# EAGLE board MagRes Sensor (EAGLE 7.5.0)
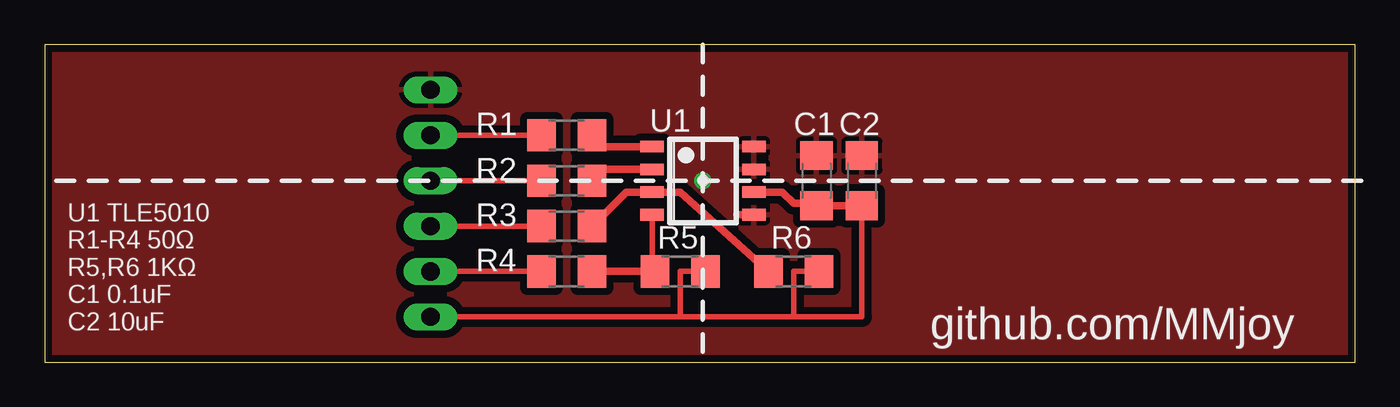
[diagram p0: board, top side]
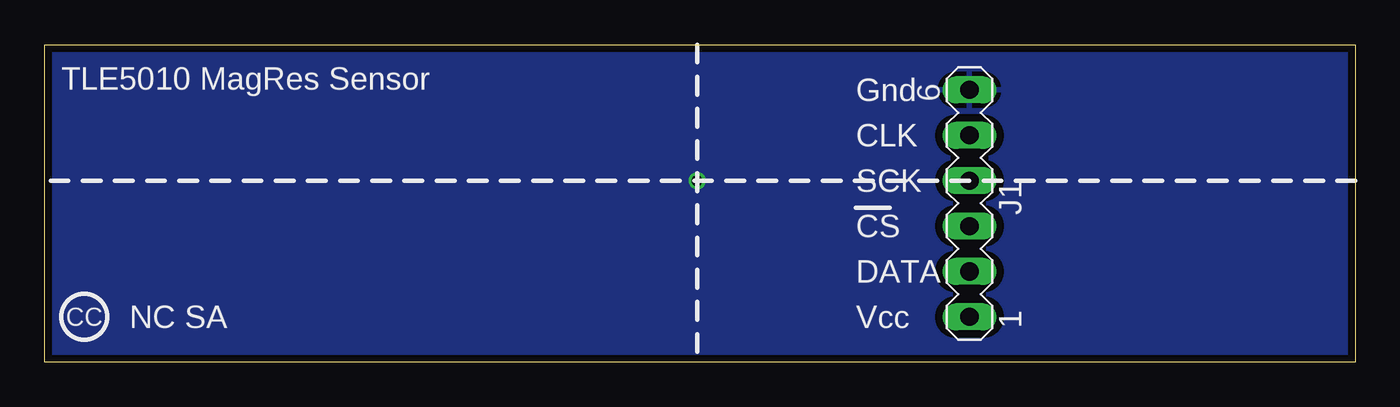
[diagram p1: board, bottom side, seen from below]

Size 73.33 x 17.77 mm. Coordinates in mm from the lower left corner, seen from the top.
Outline: 0,0 73.33,0 73.33,17.77 0,17.77 0,0
Copper layers (1*16): Top 0.0356mm / dielectric 1.5011mm / Bottom 0.0356mm
Design rules "OSH Park 2layer": minimum track width 6mil, minimum drill 13mil, track to track 6mil, track to pad 6mil, pad to pad 6mil, via to via 6mil, smd to smd 6mil, copper to edge 15mil, drill to drill 6mil, minimum pad ring 7mil, minimum via ring 7mil, stop-mask expansion 2.5mil, vias tented up to drill 0mil, thermal gap 10mil

## Footprints (pad centres in the part's own frame; a part is rotated, then mirrored left to right if it is on the bottom)
C1206 = smd 1.6 x 1.8: 1 -1.4,0; 2 1.4,0
MA06-1 = drill 1.016 long: 1 -6.35,0; 2 -3.81,0; 3 -1.27,0; 4 1.27,0; 5 3.81,0; 6 6.35,0
R1206 = smd 1.6 x 1.803: 1 -1.422,0; 2 1.422,0
PG-DSO-8 = smd 0.65 x 1.31: 1 -1.905,-2.845; 2 -0.635,-2.845; 3 0.635,-2.845; 4 1.905,-2.845; 5 1.905,2.845; 6 0.635,2.845; 7 -0.635,2.845; 8 -1.905,2.845

## Placement (x,y rotation side)
C1  0.1uF  [C1206]  43.18,10.16 270 top
C2  10uF  [C1206]  45.72,10.16 270 top
J1  [MA06-1]  21.59,8.89 90 bottom
R1  50  [R1206]  29.21,12.7 0 top
R2  50  [R1206]  29.21,10.16 0 top
R3  50  [R1206]  29.21,7.62 0 top
R4  50  [R1206]  29.21,5.08 0 top
R5  1K  [R1206]  35.56,5.08 0 top
R6  1K  [R1206]  41.91,5.08 0 top
U1  TLE5010  [PG-DSO-8]  36.83,10.16 270 top

## Library data of the parts
C1 C2 R1-R6 = resistor
J1 = con-lstb; OC_FARNELL: unknown; OC_NEWARK: unknown
U1 = infineon

## Nets
GND: C1.1 C2.1 J1.6 U1.5 U1.7 U1.8
N$1: R1.2 U1.1
N$2: R2.2 U1.2
N$3: J1.5 R1.1
N$4: J1.4 R2.1
N$5: J1.3 R3.1
N$6: R3.2 R6.1 U1.3
N$7: R4.2 R5.1 U1.4
N$11: J1.2 R4.1
VCC: C1.2 C2.2 J1.1 R5.2 R6.2 U1.6

## Tracks (layer width: path | path; a pad name or v marks a point on that pad's centre or on a via)
GND  (via drill 0.6)
  Top 0.406: U1.5 38.73,8.26 | 42.67,12.06 arc-90 C1.1
  other vias: 36.83,10.16
  pour Top (isolate 0.406): 0,0 0,17.78 73.66,17.78 73.66,0
  pour Bottom (isolate 0.406): 0,0 0,17.78 73.66,17.78 73.66,0
N$1
  Top 0.406: U1.1 30.63,12.06 R1.2
N$2
  Top 0.406: U1.2 30.63,10.79 R2.2
N$3
  Top 0.305: J1.5 R1.1
N$4
  Top 0.305: J1.4 R2.1
N$5
  Top 0.305: J1.3 R3.1
N$6
  Top 0.406: R3.2 32.54,9.53 U1.3 35.56,9.53 R6.1
N$7
  Top 0.305: U1.4 33.98,5.08 R5.1
  Top 0.406: R4.2 R5.1
N$11
  Top 0.305: J1.2 R4.1
VCC
  Top 0.305: J1.1 35.56,2.54 | 35.56,2.54 41.91,2.54 | 41.91,2.54 45.72,2.54 C2.2 | R6.2 41.91,5.08 41.91,2.54 | R5.2 35.56,5.08 35.56,2.54
  Top 0.406: U1.6 41.27,9.53 41.91,8.89 43.05,8.89 C1.2 C2.2

## Text on the board
tNames: U1 TLE5010 / R1-R4 50Ω / R5,R6 1KΩ / C1 0.1uF / C2 10uF | github.com/MMjoy
bNames: Gnd | TLE5010 MagRes Sensor | CLK | SCK | CS | DATA | Vcc | NC SA | CC